# EAGLE board back (EAGLE 7.7.0)

Size 170 x 86 mm. Coordinates in mm from the lower left corner, seen from the top.
Outline: 0,0 0,86 170,86 170,0 0,0
Outline: 138,50.8 138,39.8 arc90 139,38.8 151,38.8 arc90 152,39.8 152,50.8 arc90 151,51.8 139,51.8 arc90 138,50.8
Outline: 23,68 23,56 arc180 27,56 27,68 arc180 23,68
Outline: 31,68 31,56 arc180 35,56 35,68 arc180 31,68
Outline: 39,68 39,56 arc180 43,56 43,68 arc180 39,68
Outline: 15,68 15,56 arc180 19,56 19,68 arc180 15,68
Outline: 7,68 7,56 arc180 11,56 11,68 arc180 7,68
Outline: 51,56 51,68 arc180 47,68 47,56 arc180 51,56
Outline: 55,68 55,56 arc180 59,56 59,68 arc180 55,68
Outline: 63,68 63,56 arc180 67,56 67,68 arc180 63,68
Outline: 71,68 71,56 arc180 75,56 75,68 arc180 71,68
Outline: 83,56 83,68 arc180 79,68 79,56 arc180 83,56
Outline: 91,56 91,68 arc180 87,68 87,56 arc180 91,56
Outline: 99,56 99,68 arc180 95,68 95,56 arc180 99,56
Outline: 107,56 107,68 arc180 103,68 103,56 arc180 107,56
Copper layers (1*16): Top 0.018mm / dielectric 1.55mm / Bottom 0.018mm
Design rules "Multi-CB_2L_125um-Tracks_OL35um": minimum track width 0.125mm, minimum drill 0.2mm, track to track 0.125mm, track to pad 0.125mm, pad to pad 0.125mm, via to via 0.125mm, smd to smd 0mil, copper to edge 0.2mm, drill to drill 0.2mm, minimum pad ring 0.125mm, minimum via ring 0.125mm, stop-mask expansion 2mil, vias tented up to drill 0.45mm, thermal gap 0.2mm
Holes 8 mm at 65,46.35
Holes 11 mm at 25,29.25 45,29.25 85,29.25
Holes 9 mm at 125,46.3
Holes 4.2 mm at 15,79 155,79 155,7 15,7

## Placement (x,y rotation side)
E$2  [LOGO1]  120,65 0 top
E$3  [CE-5MM-MIN-SIZE]  144,7 0 top

## Library data of the parts
E$2 E$3 = ibek

## Text on the board
tPlace: DEVELOPED BY: / EDWIN KRASSER, INGENEURBÜRO FÜR ELEKTROTECHNIK / SCHWERPUNKT F&E ELEKTRONIK, 8010 GRAZ, AUSTRIA / VIRTUBE TECHNOLOGY, VERSION 1, 2024 / www.ib-ekrasser.at/virtube / / SUPPLY: 5V, 500mA, MAX POWER <2.5W FUSE: SCHURTER, OMF-2A / SUPPLY: 12-24V, 4A, MAX POWER <65W FUSE: SCHURTER, OMF-4A / / VERSION: PROTOTYPE-SERIES / USE STABILIZED AND GROUNDED SUPPLIES / FOR BEST NOISE PERFORMANCE! / / MADE IN EUROPE.